# Altium PCB 26_AKS.PcbDoc
Units mm, origin at the board's own origin, x right, y up, seen from the top; angles counter-clockwise.
Board outline 51.99 x 52 mm, 2 copper layers (Top Layer, Bottom Layer), stack 1.535 mm thick; 53 components, 27 nets, 143 pads, 35 vias.
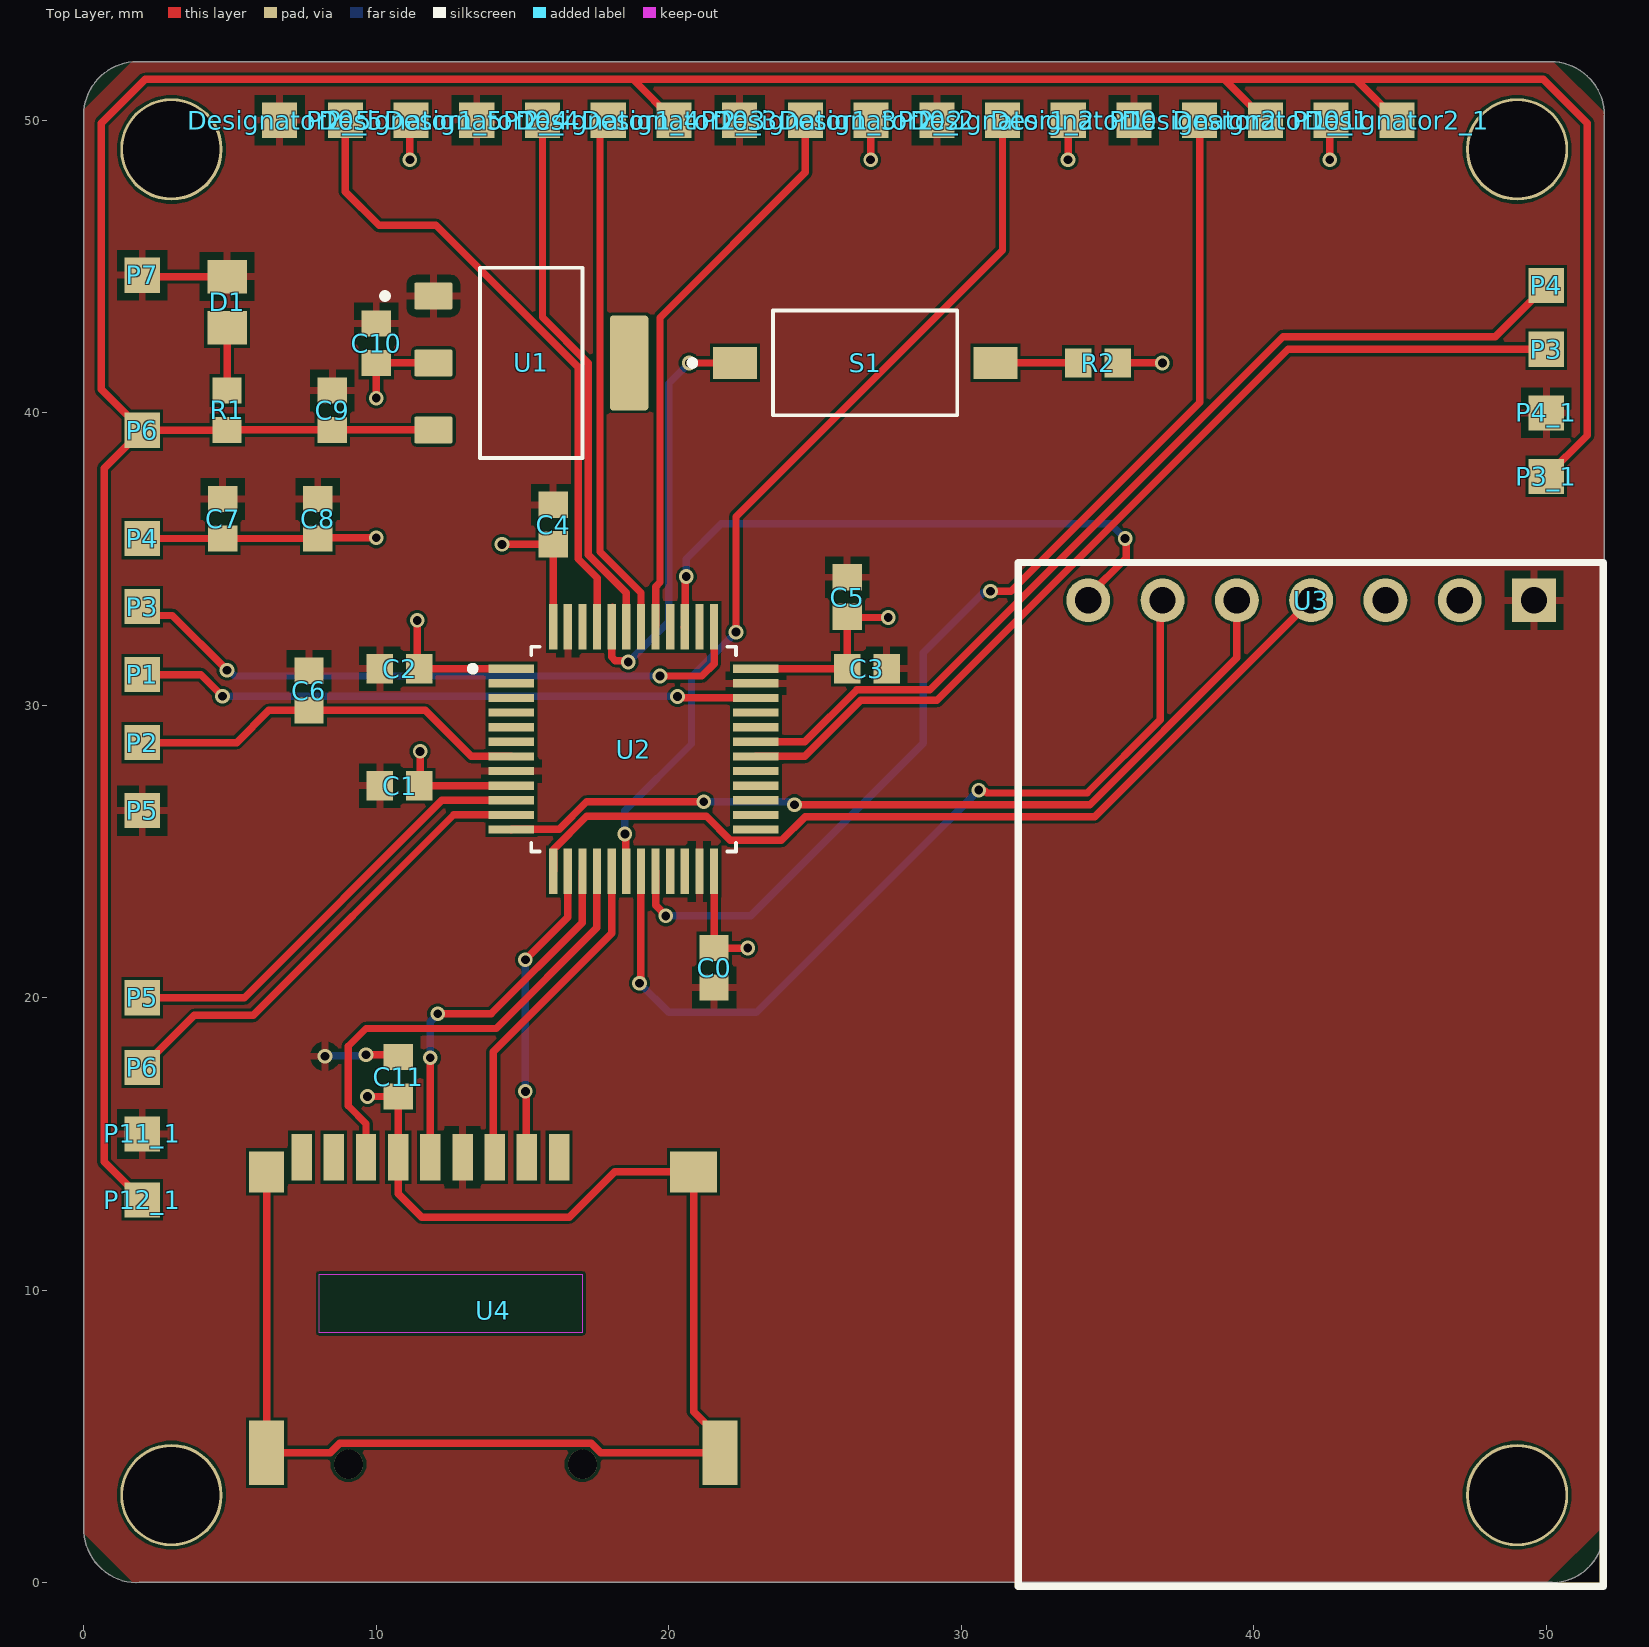
[diagram p0: Top Layer view]
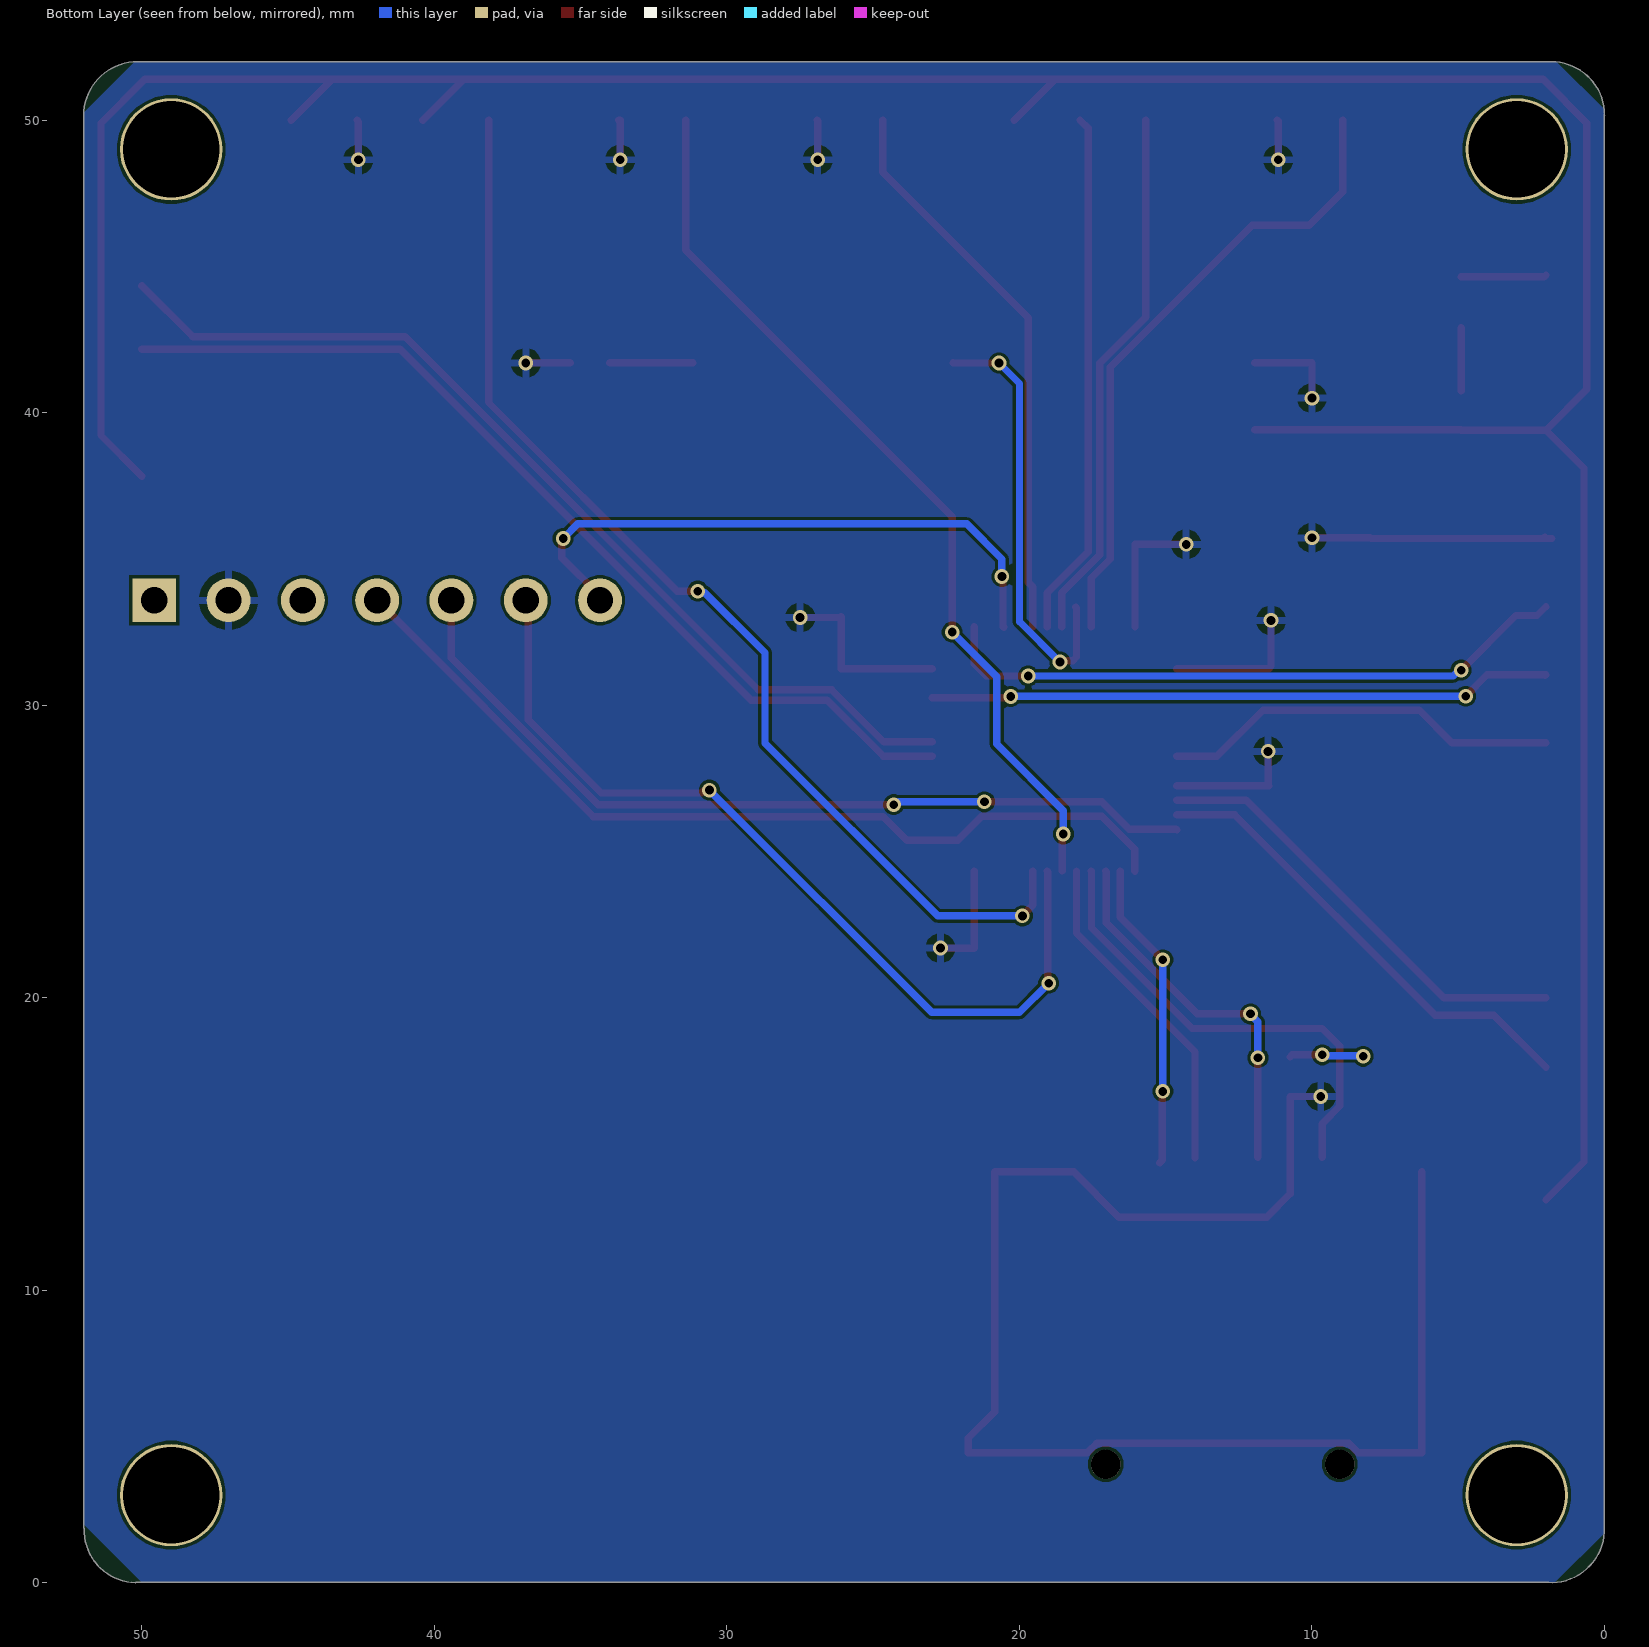
[diagram p1: Bottom Layer view, seen from below]
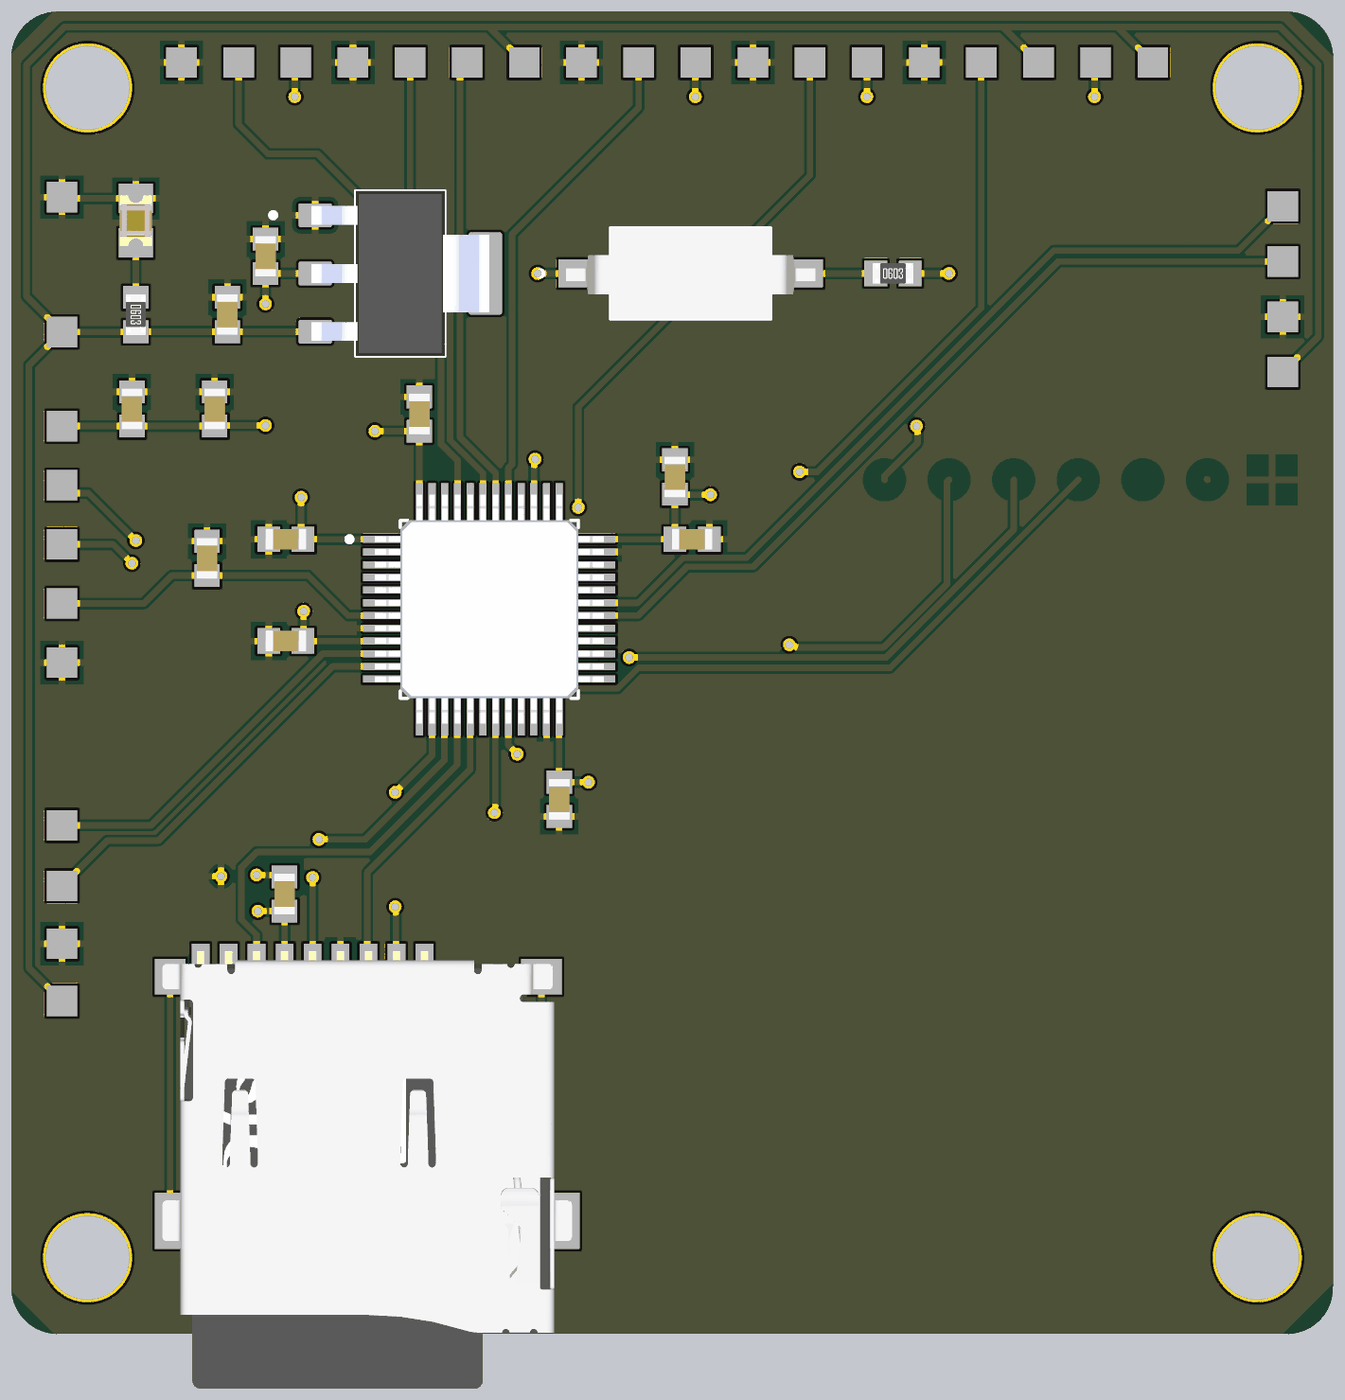
[diagram p2: 3D render of the assembled board from above, using the file's embedded part models]

## Layer stack, top to bottom
Top Solder: solder mask 0.0305, Solder Resist, Dk 3.5
Top Layer: signal copper 0.035
Dielectric 1: dielectric 1.465, FR-4, Dk 4.8
Bottom Layer: signal copper 0.035
Bottom Solder: solder mask 0.0305, Solder Resist, Dk 3.5

## Board outline
0.003,1.9 0.003,50.218 0,50.177 cw(c1.823,50.177) 1.823,52 50.151,52 cw(c50.151,50.161) 51.99,50.161 51.99,1.869 51.972,1.852 cw(c50.173,1.8) 50.224,0 50.2,0.015 1.913,0.015 1.786,0 cw(c1.844,1.842)

## Design rules (kind name [scope] priority, off if disabled: settings)
Clearance [All] p1: gap=0.1 ignorepadtopadclearanceinfootprint=FALSE
PolygonConnect [All] p1: connectstyle=Relief reliefconductorwidth=0.254 reliefentries=4 polygonreliefangle="90 Angle" airgapwidth=0.254
RoutingVias [All] p1: holewidth=0.3 width=0.5 viastyle="Through Hole" minholewidth=0.3 minwidth=0.5 maxholewidth=0.711 maxwidth=1.27
SolderMaskExpansion [All] p1: expansion=0.102 istentingtop=FALSE
Width [All] p1: maxlimit=0.254 minlimit=0.254 preferedwidth=0.254
30 further rules are at their usual default settings.

## Classes and differential pairs
component class 26_AKS: C0 C1 C2 C3 C4 C5 C6 C7 C8 C9 C10 C11 D1 P5 P6 P10 R1 R2 S1 U1 U2 U3 U4 U?

## Components (designator, comment, footprint, x,y, rotation, side; value= is the part's Value field where it differs from the comment)
C0 "0603, 0.1uF" "CAP 0603_1608" 21.55,21.025 r90 top
C1 "0603, 0.1uF" "CAP 0603_1608" 10.8,27.25 r0 top
C2 "0603, 0.1uF" "CAP 0603_1608" 10.8,31.25 r0 top
C3 "0603, 0.1uF" "CAP 0603_1608" 26.775,31.25 r180 top
C4 "0603, 0.1uF" "CAP 0603_1608" 16.05,36.175 r90 top
C5 "0603, 4.7uF" "CAP 0603_1608" 26.1,33.7 r90 top
C6 "0603, 0.1uF" "CAP 0603_1608" 7.7,30.5 r90 top
C7 "0603, 0.1uF" "CAP 0603_1608" 4.75,36.375 r90 top
C8 "0603, 0.1uF" "CAP 0603_1608" 8,36.375 r90 top
C9 "0603, 10uF" "CAP 0603_1608" 8.5,40.087 r270 top
C10 "0603, 10uF" "CAP 0603_1608" 10,42.377 r270 top
C11 "0603, 1uF" "CAP 0603_1608" 10.75,17.3 r90 top
D1 "0805" "LED 0805_2012 RED" 4.9,43.777 r90 top
Designator1 "Comment" Pad#1 33.657,50 r0 top
Designator1_1 "Comment" Pad#1 40.397,50 r0 top
Designator1_2 "Comment" Pad#1 31.41,50 r180 top
Designator1_3 "Comment" Pad#2 27.67,50 r180 top
Designator1_4 "Comment" Pad#3 19.483,50 r180 top
Designator1_5 "Comment" Pad#4 11.332,50 r180 top
Designator2 "Comment" Pad#1 38.15,50 r0 top
Designator2_1 "Comment" Pad#1 44.89,50 r0 top
Designator2_2 "Comment" Pad#5 30.352,50 r180 top
Designator2_3 "Comment" Pad#6 22.201,50 r180 top
Designator2_4 "Comment" Pad#7 14.049,50 r180 top
Designator2_5 "Comment" Pad#8 6.607,50 r180 top
P1 "Pad" PAD 2,31.05 r0 top
P2 "Pad" PAD 2,28.725 r0 top
P3 "Pad" Pad#1 50,42.171 r0 top
P3 "Pad" PAD 2,33.375 r0 top
P3_1 "Pad" Pad#1 50,37.823 r0 top (schematic designator P3)
P4 "Pad" Pad#1 50,44.344 r0 top
P4 "Pad" PAD 2,35.7 r0 top
P4_1 "Pad" Pad#1 50,39.997 r0 top (schematic designator P4)
P5 "Pad" Pad#1 2,20 r90 top
P5 "Pad" PAD 2,26.4 r0 top
P6 "Pad" Pad#1 2,17.619 r90 top
P6 "Pad" PAD 2,39.402 r0 top
P7 "Pad" PAD 2,44.702 r0 top
P10 "Pad" Pad#1 35.904,50 r0 top
P10_1 "Pad" Pad#1 42.644,50 r0 top (schematic designator P10)
P10_2 "Pad" Pad#1 29.164,50 r180 top (schematic designator P10)
P10_3 "Pad" Pad#9 24.918,50 r180 top (schematic designator P10)
P10_4 "Pad" Pad#10 16.766,50 r180 top (schematic designator P10)
P10_5 "Pad" Pad#11 8.444,50 r180 top (schematic designator P10)
P11_1 "Pad" Pad#1 2,15.343 r90 top (schematic designator P11)
P12_1 "Pad" Pad#1 2,13.092 r90 top (schematic designator P12)
R1 "0603, 220" "RES 0603_1608" 4.9,40.087 r270 top
R2 "0603, ?R/K" "RES 0603_1608" 34.675,41.702 r0 top
S1 "KAE01SGGT" SW_KAE01SGGT 26.717,41.702 r0 top
U1 "AMS1117-3.3" SOT229P700X180-4N 15.3,41.702 r0 top
U2 "STM32F072C8T6" QFP50P900X900X160-48N 18.8,28.5 r0 top locked
U3 "E32-433T20D" LORA-E32 66.471,28 r90 top locked
U4 "L-KLS1-TF-003-H1.85-R" L-KLS1-TF-003-H1.85-R 14,7.7 r0 top locked

## Footprints (in the part's own frame and the unit in brackets; to place one, negate y for a bottom-side part, rotate by r counter-clockwise, add the part's x,y. Pads: shape width x height; smd on the part's side, far side on the other; paste and mask are expansions set on the pad)
"CAP 0603_1608" [mm] "Chip Capacitor, 2-Leads, Body 1.60x0.80mm, IPC Medium Density"
  rect 0.9x1 smd: 1(-0.675,0) 2(0.675,0)
  body extent -0.8,-0.41 0.8,0.41, height 0.82
L-KLS1-TF-003-H1.85-R [mm]
  rect 0.7x1.6 smd: 1(2.25,6.85) 2(1.15,6.85) 3(0.05,6.85) 4(-1.05,6.85) 5(-2.15,6.85) 6(-3.25,6.85) 7(-4.35,6.85) 8(-5.45,6.85) 9(-6.55,6.85)
  rect 1.2x2.2 smd: 6(-7.75,-3.25) 6(7.75,-3.25)
  rect 1.2x1.4 smd: 6(-7.75,6.35)
  rect 1.6x1.4 smd: 6(6.85,6.35)
  round 1 hole 1 unplated: ""(-4.95,-3.65) ""(3.05,-3.65)
  Top Layer keep-out region: -5.95,2.85 3.05,2.85 3.05,0.85 -5.95,0.85
  body extent -8.05,-9.85 8.05,7.35, height 1.9
"LED 0805_2012 RED" [mm] "Chip Diode, 2-Leads, Body 2.00x1.25mm, IPC Medium Density"
  rect 1.15x1.35 smd: 1(-0.875,0) 2(0.875,0)
  body extent -1,-0.63 1,0.63, height 0.91
LORA-E32 [mm] "Design By @Alixahedi"
  rect 1.5x1.5 hole 0.9: 1(5.588,16.891)
  round 1.5 hole 0.9: 2(5.588,19.431) 3(5.588,21.971) 4(5.588,24.511) 5(5.588,27.051) 6(5.588,29.591) 7(5.588,32.131)
  silkscreen extent -28.12,14.53 6.88,34.53, body extent -41.39,14.01 7.11,35.01, height 8.1
Pad#1 [mm]
  rect 1.2x1.2 smd: 1(0,0)
Pad#2 [mm]
  rect 1.2x1.2 smd: 1(3,0)
Pad#3 [mm]
  rect 1.2x1.2 smd: 1(1.553,0)
Pad#4 [mm]
  rect 1.2x1.2 smd: 1(0.141,0)
Pad#5 [mm]
  rect 1.2x1.2 smd: 1(3.435,0)
Pad#6 [mm]
  rect 1.2x1.2 smd: 1(2.024,0)
Pad#7 [mm]
  rect 1.2x1.2 smd: 1(0.612,0)
Pad#8 [mm]
  rect 1.2x1.2 smd: 1(-0.09,0)
Pad#9 [mm]
  rect 1.2x1.2 smd: 1(2.494,0)
Pad#10 [mm]
  rect 1.2x1.2 smd: 1(1.082,0)
Pad#11 [mm]
  rect 1.2x1.2 smd: 1(-0.5,0)
PAD [mm]
  rect 1.2x1.2 smd: 1(0,0)
QFP50P900X900X160-48N [mm]
  rect 1.56x0.28 smd: 1(-4.18,2.75) 2(-4.18,2.25) 3(-4.18,1.75) 4(-4.18,1.25) 5(-4.18,0.75) 6(-4.18,0.25) 7(-4.18,-0.25) 8(-4.18,-0.75) 9(-4.18,-1.25) 10(-4.18,-1.75) 11(-4.18,-2.25) 12(-4.18,-2.75) 25(4.18,-2.75) 26(4.18,-2.25) 27(4.18,-1.75) 28(4.18,-1.25) 29(4.18,-0.75) 30(4.18,-0.25) 31(4.18,0.25) 32(4.18,0.75) 33(4.18,1.25) 34(4.18,1.75) 35(4.18,2.25) 36(4.18,2.75)
  rect 0.28x1.56 smd: 13(-2.75,-4.18) 14(-2.25,-4.18) 15(-1.75,-4.18) 16(-1.25,-4.18) 17(-0.75,-4.18) 18(-0.25,-4.18) 19(0.25,-4.18) 20(0.75,-4.18) 21(1.25,-4.18) 22(1.75,-4.18) 23(2.25,-4.18) 24(2.75,-4.18) 37(2.75,4.18) 38(2.25,4.18) 39(1.75,4.18) 40(1.25,4.18) 41(0.75,4.18) 42(0.25,4.18) 43(-0.25,4.18) 44(-0.75,4.18) 45(-1.25,4.18) 46(-1.75,4.18) 47(-2.25,4.18) 48(-2.75,4.18)
  silkscreen extent -5.6,-3.5 3.5,3.5, body extent -4.5,-4.5 4.5,4.5, height 1.53
"RES 0603_1608" [mm] "Chip Resistor, 2-Leads, Body 1.60x0.80mm, IPC Medium Density"
  rect 0.9x1 smd: 1(-0.675,0) 2(0.675,0)
  body extent -0.8,-0.4 0.8,0.4, height 0.45
SOT229P700X180-4N [mm]
  rrect15% 1.31x0.93 smd: 1(-3.345,2.29) 2(-3.345,0) 3(-3.345,-2.29)
  rrect15% 1.31x3.24 smd: 4(3.345,0)
  silkscreen extent -5.1,-3.25 1.75,3.25, body extent -3.5,-3.25 3.5,3.25, height 1.8
SW_KAE01SGGT [mm]
  rect 1.5x1.1 smd: 1(-4.45,0) 2(4.45,0)
  silkscreen extent -6.01,-1.79 3.15,1.79, body extent -4.9,-1.79 4.9,1.79, height 3.13

## Part data
C0 C1 C2 C3 C4 C5 C6 C7 C8 C9 C10 C11: library part "0603 Kapasitör"
D1: library part "0805 LED Red"
R1 R2: library part "0603 Direnç"
S1: "Dip Switch SPST 1 Position Surface Mount Slide (Standard) Actuator 25mA 24VDC", Package=None, Availability="In Stock", Check_prices=https://www.snapeda.com/parts/KAE01SGGT/E-Switch/view-part/?ref=eda, MF=E-Switch, MP=KAE01SGGT, Price=None, Purchase-URL=https://pricing.snapeda.com/search/part/KAE01SGGT/?ref=eda, SnapEDA_Link=https://www.snapeda.com/parts/KAE01SGGT/E-Switch/view-part/?ref=snap
U1: "Sot223/Pkg 1-Amp 3.3-Volt Low Drop Out Voltage Regulatator", Package="SOT-223 Seeed Technology", Check_prices=https://www.snapeda.com/parts/AMS1117-3.3/Advanced+Monolithic+Systems/view-part/?ref=eda, MF="Advanced Monolithic Systems", MP=AMS1117-3.3, SnapEDA_Link=https://www.snapeda.com/parts/AMS1117-3.3/Advanced+Monolithic+Systems/view-part/?ref=snap
U2: "ARMÂ® CortexÂ®-M0 STM32F0 Microcontroller IC 32-Bit Single-Core 48MHz 64KB (64K x 8) FLASH 48-LQFP (7x7)", Package="LQFP-48 STMicroelectronics", Check_prices=https://www.snapeda.com/parts/STM32F072C8T6/STMicroelectronics/view-part/?ref=eda, MF=STMicroelectronics, MP=STM32F072C8T6, SnapEDA_Link=https://www.snapeda.com/parts/STM32F072C8T6/STMicroelectronics/view-part/?ref=snap
U3: library part LORA-E32, "Design By @Alixahedi"

## Free pads (board coordinates)
  round 3.5 hole 3.3: 2(3,3) 2(3,49) 2(49,3) 2(49,49)

## Via types
v1: diameter 0.5, hole 0.3, Top Layer to Bottom Layer, 35 vias

## Nets (pads, with @x,y where several pads share a name; then routed paths per layer and width w, separated by ;. In a path a pad name is that pad's centre, name@x,y a point inside that pad or via, vN(x,y) a via of type N, cw(c..) or ccw(c..) an arc to the next point about the centre after c; other vN are vias at no path point)
+3V3: C0.2 C1.2 C2.2 C3.2 C4.1 C5.1 C7.1 C8.1 C10.2 C11.1 Designator1.1 Designator1_5.1 Designator2_2.1 P4.1@2,35.7 P10_1.1 R2.2 U1.2 U2.1 U2.9 U2.24 U2.36 U2.48 U3.2 U4.6 | length 92.7
  Top Layer w0.254: P4.1@1.8,35.7 P4.1@2,35.7 ; P4.1@2.048,35.748 P4.1@2,35.7 ; U4.6@6.25,14.05 6.25,4.45 8.422,4.45 8.749,4.777 17.351,4.777 17.678,4.45 21.75,4.45 21.75,4.95 20.85,5.85 20.85,14.05 18.15,14.05 16.6,12.5 11.55,12.5 10.75,13.3 10.75,14.55 C11.1 v1(9.7,16.625) ; C8.1 C7.1 P4.1@2,35.7 ; C8.1@8.025,35.725 v1(10,35.725) ; v1(10,40.502) C10.2 U1.2 ; v1@11.15,48.7 11.15,49.96 Designator1_5.1 ; v1(11.4,32.9) 11.4,31.325 C2.2 U2.1 ; v1(11.5,28.423) 11.5,27.275 C1.2 U2.9 ; v1(14.3,35.5) C4.1 U2.48 ; U2.24 C0.2 v1(22.7,21.7) ; U2.36 C3.2 C5.1 26.125,33 v1(27.5,33) ; v1(26.9,48.65) 26.9,49.983 Designator2_2.1 ; v1@33.65,48.8 33.65,49.993 Designator1.1 Designator1.1@33.7,50 ; R2.2 v1(36.875,41.702) ; v1@42.6,48.75 42.6,49.956 P10_1.1 ; U3.2@47.02,33.608 U3.2
  other v1: 11.15,48.65 33.65,48.65 42.6,48.65
+5V: C9.2 Designator1_1.1 Designator2_1.1 Designator2_3.1 P3_1.1 P6.1@2,39.402 P12_1.1 R1.2 U1.3 | length 119.1
  Top Layer w0.254: P12_1.1 0.7,14.392 0.7,38.102 P6.1@2,39.402 ; U1.3 C9.2 R1.2 4.89,39.402 P6.1@2,39.402 ; Designator2_3.1 18.777,51.4 ; Designator1_1.1 38.997,51.4 ; Designator2_1.1 43.49,51.4 ; P3_1.1 51.4,39.223 51.4,49.9 49.9,51.4 43.49,51.4 ; P6.1@2,39.402 0.6,40.802 0.6,49.9 2.1,51.4 18.777,51.4 ; 18.777,51.4 38.997,51.4 ; 38.997,51.4 43.49,51.4
CS: U2.14 U4.2 | length 10.6
  Top Layer w0.254: v1(15.1,16.8) 15.125,16.775 15.125,14.44 U4.2@15.2,14.365 ; v1(15.1,21.3) 16.55,22.75 U2.14
  Bottom Layer w0.254: v1(15.1,16.8) v1(15.1,21.3)
GND: C0.1 C1.1 C2.1 C3.1 C4.2 C5.2 C6.2 C7.2 C8.2 C9.1 C10.1 C11.2 D1.2 Designator2_4.1 Designator2_5.1 P4_1.1 P5.1@2,26.4 P7.1 P10.1 P10_2.1 P10_3.1 P11_1.1 U1.1 U2.8 U2.23 U2.35 U2.47 U3.1 U4.4 | length 5.5
  Top Layer w0.254: P7.1 2.05,44.652 D1.2 ; v1(9.65,18.05) 10.675,18.05 C11.2
  Bottom Layer w0.254: v1(8.25,18) 8.275,18.025 9.625,18.025 v1(9.65,18.05)
İzo_1: P5.1@2,20 U2.10 | length 15.4
  Top Layer w0.254: P5.1@2,20 5.496,20 12.246,26.75 U2.10
İzo_2: P6.1@2,17.619 U2.11 | length 16.2
  Top Layer w0.254: P6.1@2,17.619 3.781,19.4 5.792,19.4 12.642,26.25 U2.11
Lora_Rx: U2.12 U3.5 | length 29.3
  Top Layer w0.254: U2.12 14.633,25.763 16.251,25.763 17.188,26.7 v1(21.2,26.7) ; v1(24.3,26.6) 34.401,26.6 39.42,31.619 U3.5
  Bottom Layer w0.254: v1(21.2,26.7) 24.133,26.7 24.233,26.6 v1(24.3,26.6)
Lora_Tx: U2.13 U3.4 | length 30.9
  Top Layer w0.254: U2.13 16.063,24.333 16.063,25.074 17.189,26.2 21.289,26.2 22.106,25.383 23.854,25.383 24.663,26.192 34.564,26.192 U3.4
M0: U2.39 U3.7 | length 20.7
  Top Layer w0.254: U2.39@20.537,32.667 U2.39 20.563,32.693 20.563,34.363 v1(20.6,34.4) ; U3.7 34.34,33.74 35.647,35.047 35.647,35.653 v1(35.6,35.7)
  Bottom Layer w0.254: v1(20.6,34.4) 20.6,35 21.8,36.2 35.1,36.2 v1(35.6,35.7)
M1: U2.19 U3.6 | length 30.4
  Top Layer w0.254: v1(19,20.5) 19.037,20.537 19.037,24.307 U2.19 ; v1(30.6,27.1) 30.647,27.053 30.819,27.053 30.872,27 34.3,27 36.8,29.5 36.8,33.508 U3.6
  Bottom Layer w0.254: v1(19,20.5) 20,19.5 23,19.5 v1(30.6,27.1)
MISO: U2.16 U4.7 | length 16.1
  Top Layer w0.254: U4.7 9.65,15.7 9.05,16.3 9.05,18.35 9.65,18.95 14.1,18.95 17.537,22.387 17.537,24.307 U2.16
MOSI: U2.17 U4.3 | length 11.5
  Top Layer w0.254: U4.3@14,14.533 14,18.15 18.05,22.2 U2.17
NetD1_1: D1.1 R1.1 | length 2.2
  Top Layer w0.254: R1.1@4.9,40.752 D1.1
NetR2_1: R2.1 S1.2 | length 2.8
  Top Layer w0.254: S1.2 R2.1
NetS1_1: S1.1 U2.44 | length 15
  Top Layer w0.254: U2.44@18.077,33.347 18.05,33.32 U2.44 18.05,31.649 18.175,31.524 18.568,31.524 v1(18.615,31.477) ; v1(20.7,41.7) 22.265,41.7 S1.1
  Bottom Layer w0.254: v1(18.615,31.477) 20,32.862 20,41 v1(20.7,41.7)
Nex_Rx: P3.1@50,42.171 U2.30 | length 32.8
  Top Layer w0.254: U2.30 24.65,28.25 26.569,30.169 29.169,30.169 41.171,42.171 P3.1@50,42.171
Nex_Tx: P4.1@50,44.344 U2.31 | length 33.5
  Top Layer w0.254: U2.31 24.649,28.75 26.422,30.523 28.923,30.523 41,42.6 48.256,42.6 P4.1@50,44.344
PB0: Designator1_2.1 U2.18 | length 31
  Top Layer w0.254: v1(18.5,25.6) 18.537,25.563 U2.18@18.537,24.333 ; v1(22.3,32.5) 22.3,36.45 31.41,45.56 Designator1_2.1
  Bottom Layer w0.254: v1(18.5,25.6) 18.5,26.4 20.777,28.677 20.777,30.977 v1(22.3,32.5)
PB2: Designator2.1 U2.20 | length 38.7
  Top Layer w0.254: U2.20 19.55,23.159 19.9,22.809 v1(19.9,22.8) ; v1(31,33.9) 31.7,33.9 38.15,40.35 Designator2.1
  Bottom Layer w0.254: v1(19.9,22.8) 22.8,22.8 28.7,28.7 28.7,31.8 30.753,33.853 30.953,33.853 v1(31,33.9)
PB5: Designator1_3.1 U2.41 | length 19.4
  Top Layer w0.254: U2.41 19.55,34.05 19.7,34.2 19.7,43.25 24.67,48.22 Designator1_3.1
PB6: Designator1_4.1 U2.42 | length 18
  Top Layer w0.254: Designator1_4.1 17.65,49.72 17.65,35.251 19.05,33.851 U2.42
PB7: P10_4.1 U2.43 | length 18.5
  Top Layer w0.254: P10_4.1 15.684,43.266 17.254,41.696 17.254,35.147 18.55,33.851 U2.43
PB8: P10_5.1 U2.45 | length 22
  Top Layer w0.254: P10_5.1 8.944,47.556 10.094,46.406 12.043,46.406 16.9,41.549 16.9,35 17.55,34.35 U2.45
RST: C6.1 P2.1 U2.7 | length 13.7
  Top Layer w0.254: P2.1 5.225,28.725 6.325,29.825 C6.1 11.675,29.825 13.25,28.25 U2.7
SCK: U2.15 U4.5 | length 13
  Top Layer w0.254: U4.5 v1(11.85,17.95) ; v1(12.1,19.45) 13.925,19.45 17.037,22.562 17.037,24.307 U2.15
  Bottom Layer w0.254: v1(11.85,17.95) 11.85,19.178 12.1,19.428 v1(12.1,19.45)
SWCLK: P3.1@2,33.375 U2.37 | length 22
  Top Layer w0.254: P3.1@2,33.375 2.307,33.068 3.032,33.068 v1(4.9,31.2) ; v1(19.7,31) 21.133,31 21.55,31.417 U2.37
  Bottom Layer w0.254: v1(4.9,31.2) 4.967,31.2 5.167,31 v1(19.7,31)
SWDIO: P1.1 U2.34 | length 21.3
  Top Layer w0.254: P1.1@2.025,31.025 P1.1 4.003,31.05 v1(4.745,30.308) ; v1(20.3,30.3) 20.337,30.263 22.967,30.263 U2.34
  Bottom Layer w0.254: v1(4.745,30.308) 4.749,30.304 20.296,30.304 v1(20.3,30.3)
pads on no net: U1.4 U2.2 U2.3 U2.4 U2.5 U2.6 U2.21 U2.22 U2.25 U2.26 U2.27 U2.28 U2.29 U2.32 U2.33 U2.38 U2.40 U2.46 U3.3 U4. U4.1 U4.8 U4.9

## Polygon pours and split planes (outlines as drawn)
+3V3 on Bottom Layer "+3V3_L02_P002" (solid, pour order 2): 0,50.356 1.644,52 50.242,52 51.99,50.252 51.99,1.998 49.994,0.003 1.695,0.003 1.695,0.023 0,1.719
GND on Top Layer "GND_L01_P000" (solid, pour order 0): 0,50.356 1.644,52 50.242,52 51.99,50.252 51.99,1.982 50.023,0.015 1.708,0.015 1.695,0.003 0.003,1.696 0.003,1.9